# EAGLE board flippr-backlight (EAGLE 6.3)
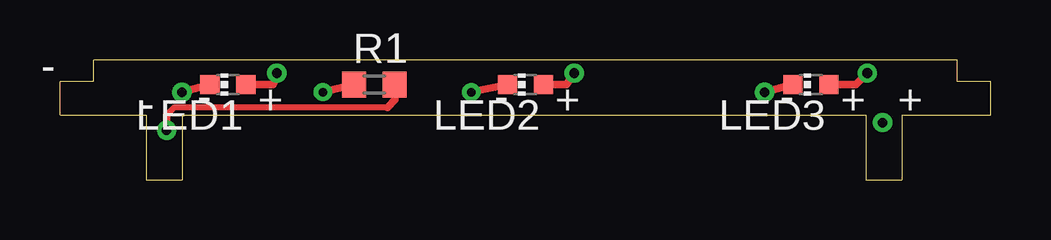
[diagram p0: board, top side]
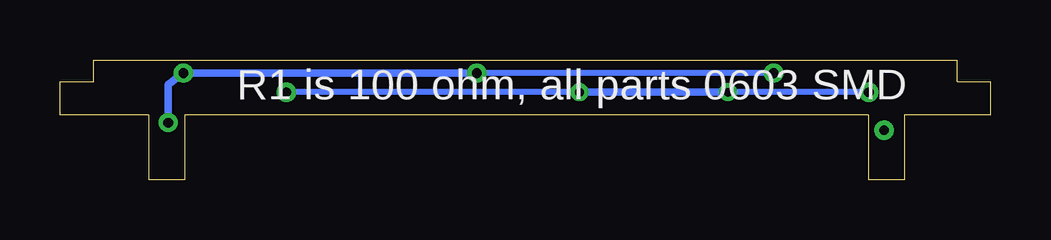
[diagram p1: board, bottom side, seen from below]

Size 38.8 x 5 mm. Coordinates in mm from the lower left corner, seen from the top.
Outline: 0,2.7 3.6,2.7 3.6,0 5.1,0 5.1,2.7 33.6,2.7 33.6,0 35.1,0 35.1,2.7 38.8,2.7 38.8,4.1 37.4,4.1 37.4,5 1.4,5 1.4,4.1 0,4.1 0,2.7
Copper layers (1*16): Top 0.035mm / dielectric 1.5mm / Bottom 0.035mm
Design rules "default": minimum track width 10mil, minimum drill 24mil, track to track 8mil, track to pad 8mil, pad to pad 8mil, via to via 8mil, smd to smd 8mil, copper to edge 40mil, drill to drill 8mil, minimum pad ring 10mil, minimum via ring 8mil, stop-mask expansion 4mil, vias tented up to drill 0mil, thermal gap 10mil

## Footprints (pad centres in the part's own frame; a part is rotated, then mirrored left to right if it is on the bottom)
CHIP-LED0603 = smd 0.8 x 0.8: A 0,-0.75; C 0,0.75
R0603 = smd 1 x 1.1: 1 -0.85,0; 2 0.85,0

## Placement (x,y rotation side)
LED1  [CHIP-LED0603]  7,3.97 90 top
LED2  [CHIP-LED0603]  19.4,3.97 90 top
LED3  [CHIP-LED0603]  31.3,3.97 90 top
R1  [R0603]  13.1,3.97 0 top

## Library data of the parts
LED1-LED3 = led
R1 = resistor

## Nets
N$1: LED1.C LED2.C LED3.C R1.1
N$2: LED1.A LED2.A LED3.A

## Tracks (layer width: path | path; a pad name or v marks a point on that pad's centre or on a via)
N$1  (via drill 0.36 pad 0.13, 0.4 pad 0.15)
  Top 0.305: LED1.C v5.08,3.65 | v29.37,3.65 LED3.C | R1.1 v10.95,3.65 | LED2.C v17.14,3.65
  Bottom 0.254: v5.08,3.65 v10.95,3.65 | v17.14,3.65 v29.37,3.65
  Bottom 0.305: v10.95,3.65 v17.14,3.65
N$2  (via drill 0.4 pad 0.15)
  Top 0.305: LED2.A 21.11,3.97 v21.43,4.45 | LED1.A 8.89,3.97 v9.05,4.45 | LED3.A 33.18,3.97 v33.66,4.45
  Bottom 0.254: v9.05,4.45 v21.43,4.45
  Bottom 0.305: v21.43,4.45 v33.66,4.45 34.29,3.97 34.29,2.38
N$4  (via drill 0.4 pad 0.15)
  Top 0.254: 13.65,3.02 4.76,3.02 4.45,2.7
  Top 0.305: 13.97,3.97 13.97,3.33 13.65,3.02 | 4.45,2.7 v4.45,2.07
N$5  (via drill 0.4 pad 0.15)
  Bottom 0.254: 34.29,3.97 v34.29,2.38

## Text on the board
tPlace: - | - | - | + | - | + | - | + | +
bPlace: R1 is 100 ohm, all parts 0603 SMD